# Altium PCB MSE-PCB-N2.PcbDoc
Units mil, origin at the board's own origin, x right, y up, seen from the top; angles counter-clockwise.
Board outline 826.77 x 1574.8 mil, 2 copper layers (Top Layer, Bottom Layer); 9 components, 20 nets, 48 pads, 0 vias.
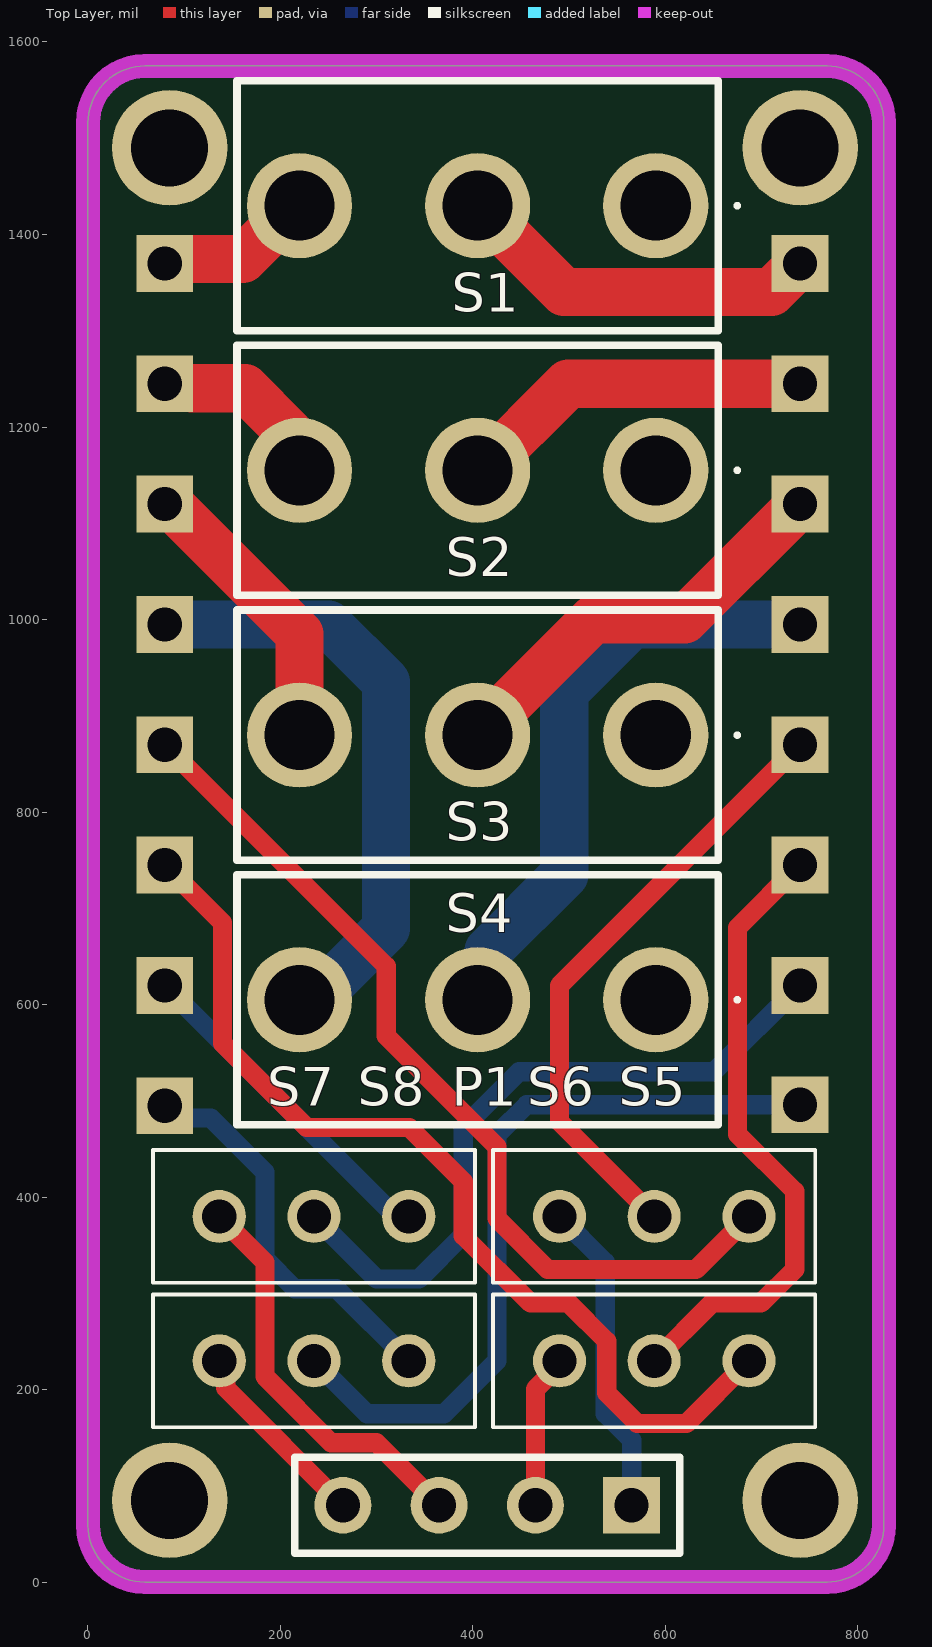
[diagram p0: Top Layer view]
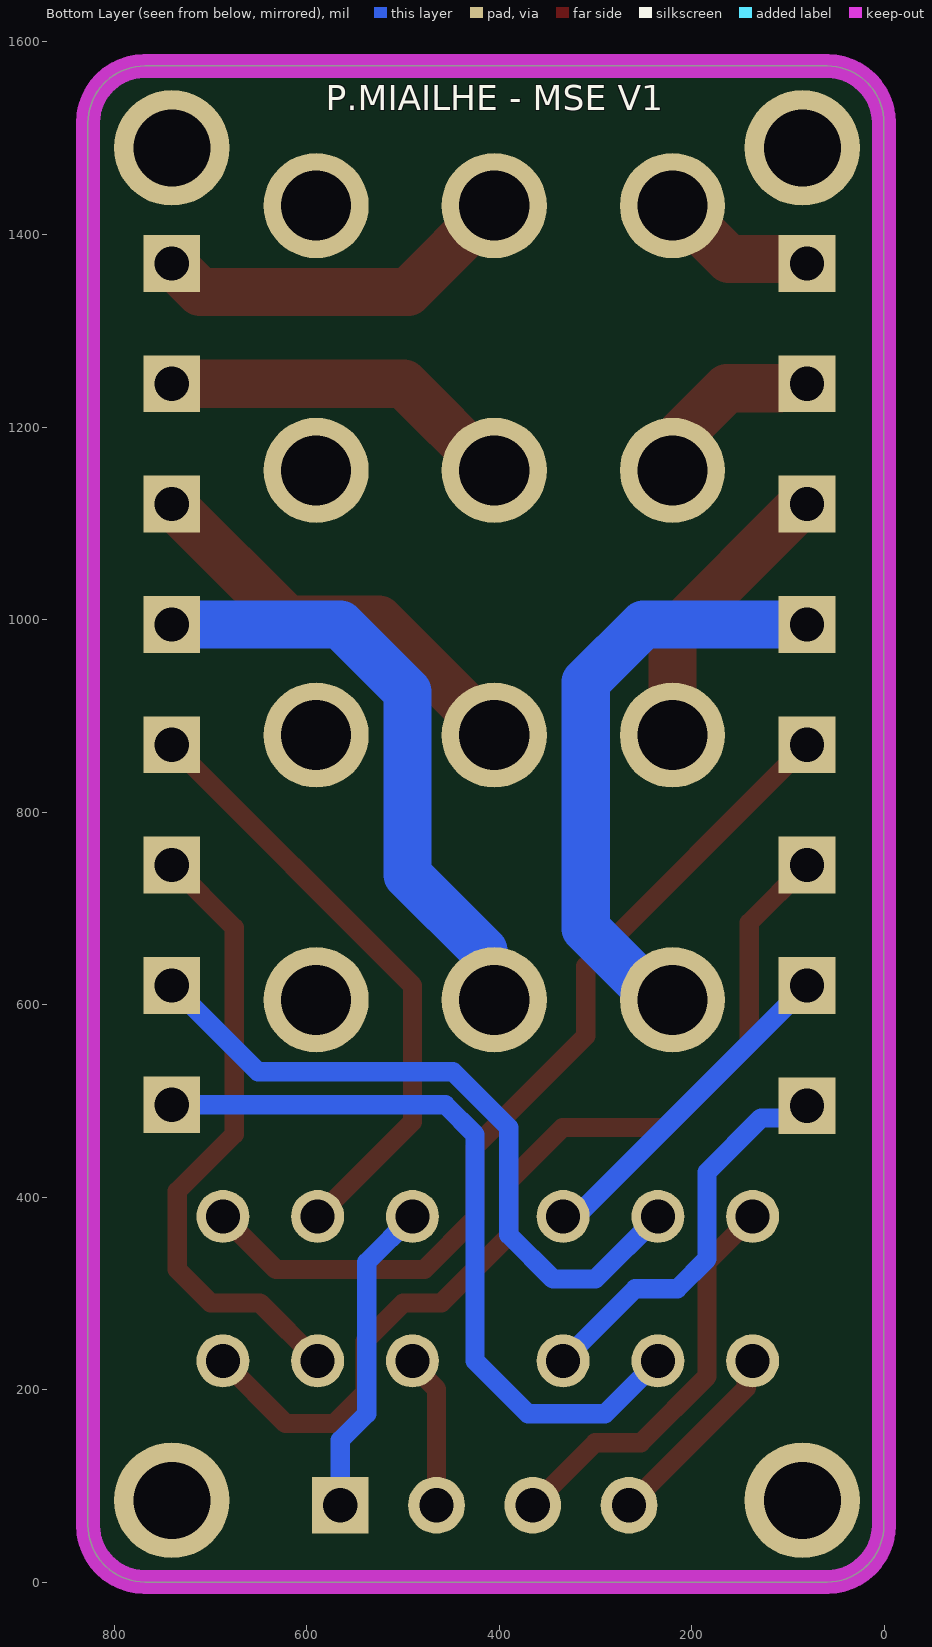
[diagram p1: Bottom Layer view, seen from below]
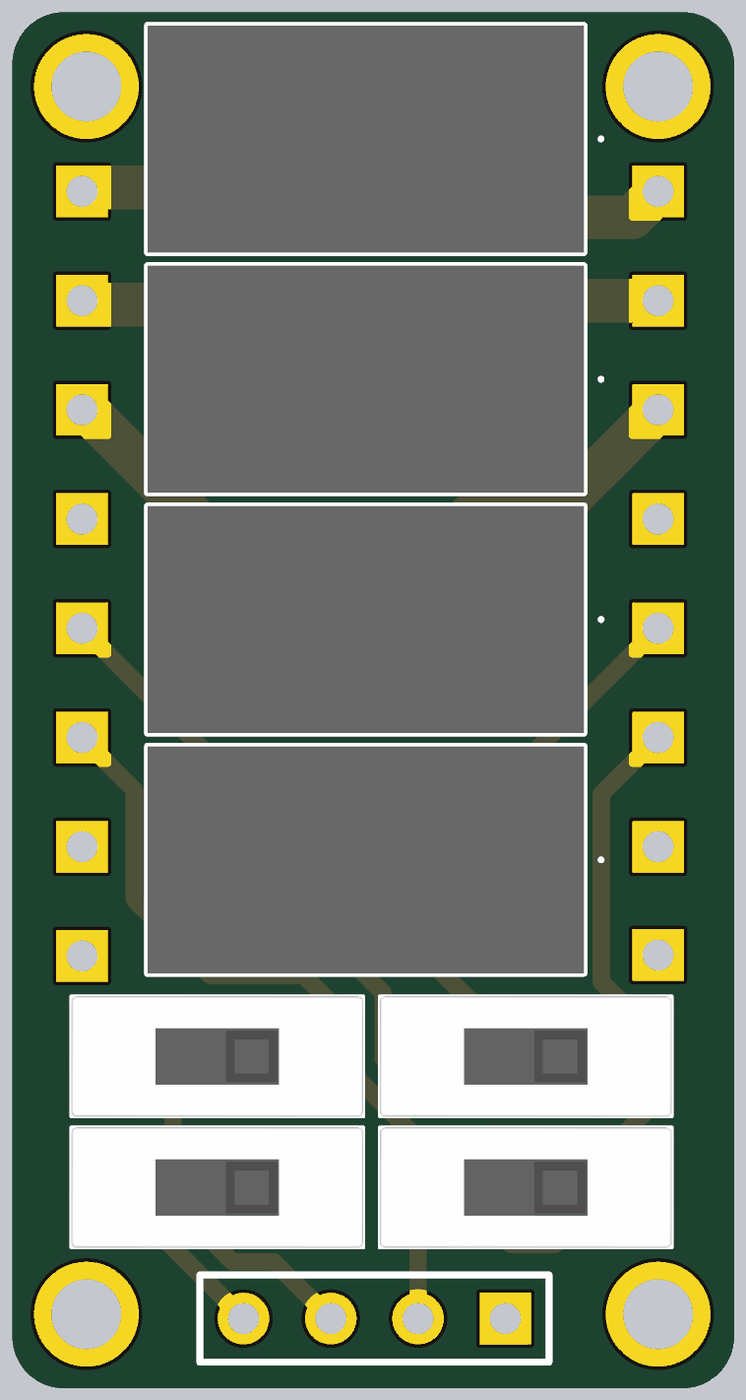
[diagram p2: 3D render of the assembled board from above, using the file's embedded part models]

## Layer stack, top to bottom
Top Solder: solder mask 0.4, Solder Resist, Dk 3.5
Top Layer: signal copper 1.4
Dielectric 1: dielectric 12.6, FR-4, Dk 4.8
Bottom Layer: signal copper 1.4
Bottom Solder: solder mask 0.4, Solder Resist, Dk 3.5

## Board outline
0.25,59.31 ccw(c59.31,59.31) 59.31,0.25 767.97,0.25 ccw(c767.97,59.31) 827.02,59.31 827.02,1516 ccw(c767.97,1516) 767.97,1575.05 59.31,1575.05 ccw(c59.3,1516) 0.25,1516

## Design rules (kind name [scope] priority, off if disabled: settings)
Clearance [All] p1: gap=10 ignorepadtopadclearanceinfootprint=FALSE except(0: Arc-Hole Track-Hole SMDPad-Hole THPad-Hole Via-Hole Fill-Hole Poly-Hole Region-Hole Text-Hole)
PolygonConnect [All] p1: connectstyle=Relief reliefconductorwidth=10 reliefentries=4 polygonreliefangle="90 Angle" airgapwidth=10
RoutingVias [All] p1: holewidth=28 width=50 viastyle="Through Hole" minholewidth=28 minwidth=50 maxholewidth=28 maxwidth=50
SolderMaskExpansion [All] p1: expansion=4 istentingtop=FALSE
Width [All] p1: maxlimit=250 minlimit=10 preferedwidth=12 minimp=50.000000 maximp=50.000000 favimp=50.000000
30 further rules are at their usual default settings.

## Components (designator, comment, footprint, x,y, rotation, side; value= is the part's Value field where it differs from the comment)
P1 "Header 4" HDR1X4 565,80 r180 top
S1 "SS12D10" SS12D10 590.04,1430 r90 top locked
S2 "SS12D10" SS12D10 590.04,1155 r90 top locked
S3 "SS12D10" SS12D10 590.04,880 r90 top locked
S4 "SS12D10" SS12D10 590.04,605 r90 top locked
S5 "SS12D00G3" SS12D00G3 588.43,380 r180 top
S6 "SS12D00G3" SS12D00G3 588.43,230 r180 top
S7 "SS12D00G3" SS12D00G3 235,380 r180 top
S8 "SS12D00G3" SS12D00G3 235,230 r180 top

## Footprints (in the part's own frame and the unit in brackets; to place one, negate y for a bottom-side part, rotate by r counter-clockwise, add the part's x,y. Pads: shape width x height; smd on the part's side, far side on the other; paste and mask are expansions set on the pad)
HDR1X4 [mm] "Connector; Header; 4 Position"
  rect 1.5x1.5 hole 0.9: 1(0,0)
  round 1.5 hole 0.9: 2(2.54,0) 3(5.08,0) 4(7.62,0)
  silkscreen extent -1.27,-1.27 8.89,1.27
SS12D00G3 [mm]
  round 1.4 hole 0.9: 1(-2.5,0) 2(0,0) 3(2.5,0)
  silkscreen extent -4.25,-1.75 4.25,1.75, body extent -4.25,-1.75 4.25,1.75, height 6.88
SS12D10 [mm]
  round 2.775 hole 1.85: 1(0,0) 2(0,4.7) 3(0,9.4)
  silkscreen extent -3.3,-2.2 3.3,11.05, body extent -3.3,-1.65 3.3,11.05, height 10.01

## Part data
P1: "Header, 4-Pin", LatestRevisionDate=17-Jul-2002, LatestRevisionNote="Re-released for DXP Platform.", Publisher="Altium Limited"
S1 S2 S3 S4: "Switch", Manufacturer_Name=DAIER, Datasheet Link=https://www.chinadaier.com/slide-switch-spdt/, Height=9.91mm, Manufacturer_Part_Number=SS12D10
S5 S6 S7 S8: "Switch", Manufacturer_Name=Vimex, Datasheet Link=http://vimex.com/switches/techdocs/SS12D00-tech.pdf, Height=7mm, Manufacturer_Part_Number=SS12D00G3

## Free pads (board coordinates)
  round 120 hole 80: 4(85,85) 4(85,1490) 4(740,85) 4(740,1490)
  rect 59.06x59.06 hole 35.43: 6(80,495) 6(80,620) 6(80,745) 6(80,870) 6(80,995) 6(80,1120) 6(80,1245) 6(80,1370) 6(740,496) 6(740,620) 6(740,745) 6(740,870) 6(740,995) 6(740,1120) 6(740,1245) 6(740,1370)

## Nets (pads, with @x,y where several pads share a name; then routed paths per layer and width w, separated by ;. In a path a pad name is that pad's centre, name@x,y a point inside that pad or via, vN(x,y) a via of type N, cw(c..) or ccw(c..) an arc to the next point about the centre after c; other vN are vias at no path point)
"Socket 12V C": pad.6@80,995 S4.3 | length 631.5
  Bottom Layer w50: pad.6@80,995 250,995 310,935 310,679.01 235.99,605 S4.3
"Socket 12V M": pad.6@80,1120 S3.3 | length 295.9
  Top Layer w50: pad.6@85,1120 219.96,985.04 S3.3
"Socket 12V PL": pad.6@80,1245 S2.3 | length 163.7
  Top Layer w50: pad.6@108.42,1240.28 163.35,1240.28 208.62,1195.01 208.62,1166.34 S2.3
"Socket 12V SEQ": pad.6@80,1370 S1.3 | length 153.4
  Top Layer w50: pad.6@89.53,1374.53 161.05,1374.53 216.52,1430 S1.3
"Socket IN ELEC M1A": pad.6@80,870 S5.1 | length 941.6
  Top Layer w20: pad.6@80,870 310,640 310,567.43 425,452.43 425,377.74 477.74,325 631.85,325 S5.1
"Socket IN ELEC M1B": pad.6@80,745 S6.1 | length 1011.7
  Top Layer w20: pad.6@80,745 140,685 140,560 227.57,472.43 333.95,472.43 390,416.37 390,360 460,290 499.49,290 539.21,250.27 539.21,196.65 570.87,165 621.85,165 S6.1
"Socket IN ELEC M2A": pad.6@80,620 S7.1 | length 352.8
  Bottom Layer w20: pad.6@80,620 313.28,386.72 326.71,386.72 S7.1
"Socket IN ELEC M2B": pad.6@80,495 S8.1 | length 415.9
  Bottom Layer w20: pad.6@80,495 92.81,482.19 127.81,482.19 184.13,425.87 184.13,335.87 215,305 258.43,305 S8.1
"Socket IN TELEC M1A": P1.1 S5.3 | length 331.1
  Bottom Layer w20: S5.3 537.56,332.44 537.56,175 565,147.56 P1.1
"Socket IN TELEC M1B": P1.2 S6.3 | length 160.4
  Top Layer w20: P1.2 465,200.73 490,225.73 S6.3
"Socket IN TELEC M2A": P1.3 S7.3 | length 422.3
  Top Layer w20: S7.3 184.13,332.44 184.13,213.61 252.74,145 300,145 P1.3
"Socket IN TELEC M2B": P1.4 S8.3 | length 212.7
  Top Layer w20: S8.3 143.29,223.28 143.29,201.71 P1.4
  Bottom Layer w20: S8.3 S8.3@143.29,223.28
"Socket OUT C": pad.6@740,995 S4.2 | length 631.3
  Bottom Layer w50: S4.2 416.34,616.34 416.34,656.34 495,735 495,925 565,995 pad.6@740,995
"Socket OUT M": pad.6@740,1120 S3.2 | length 434.4
  Top Layer w50: S3.2 525,1000 620,1000 735.47,1115.47 pad.6@740,1120
"Socket OUT M1A": pad.6@740,870 S5.2 | length 634.3
  Top Layer w20: S5.2 490,478.43 490,620 pad.6@740,870
"Socket OUT M1B": pad.6@740,745 S6.2 | length 656.9
  Top Layer w20: S6.2 648.43,290 699.41,290 734.41,325 734.41,406.06 675,465.47 675,680 pad.6@740,745
"Socket OUT M2A": pad.6@740,620 S7.2 | length 723.5
  Bottom Layer w20: S7.2 300,315 343.98,315 390,361.02 390,472.43 447.95,530.37 650.37,530.37 pad.6@740,620
"Socket OUT M2B": pad.6@740,496 S8.2 | length 807.9
  Top Layer w20: S8.2@225.5,230 S8.2
  Bottom Layer w20: S8.2 290,175 370,175 425,230 425,465 456,496 pad.6@740,496
"Socket OUT PL": pad.6@740,1245 S2.2 | length 372.3
  Top Layer w50: S2.2 409.07,1155 499.07,1245 pad.6@740,1245
"Socket OUT SEQ": pad.6@740,1370 S1.2 | length 384.4
  Top Layer w50: S1.2 494.63,1340.37 710.37,1340.37 pad.6@740,1370
pads on no net: S1.1 S2.1 S3.1 S4.1

## Keep-outs
Keep-Out Layer:
  the board outline again, w25

## Silkscreen, mask and mechanical layers (free items; w line width, h text height)
Bottom Overlay:
  text "P.MIAILHE - MSE V1" at 580,1520.47 h45
Mechanical 1:
  the board outline again, w0.5